# Altium PCB STM_mcu.PcbDoc
Units mm, origin at the board's own origin, x right, y up, seen from the top; angles counter-clockwise.
Board outline 31.49 x 24.36 mm, 4 copper layers (Top Layer, GND, PWR, Bottom Layer), stack 0.786 mm thick; 23 components, 31 nets, 129 pads, 54 vias.
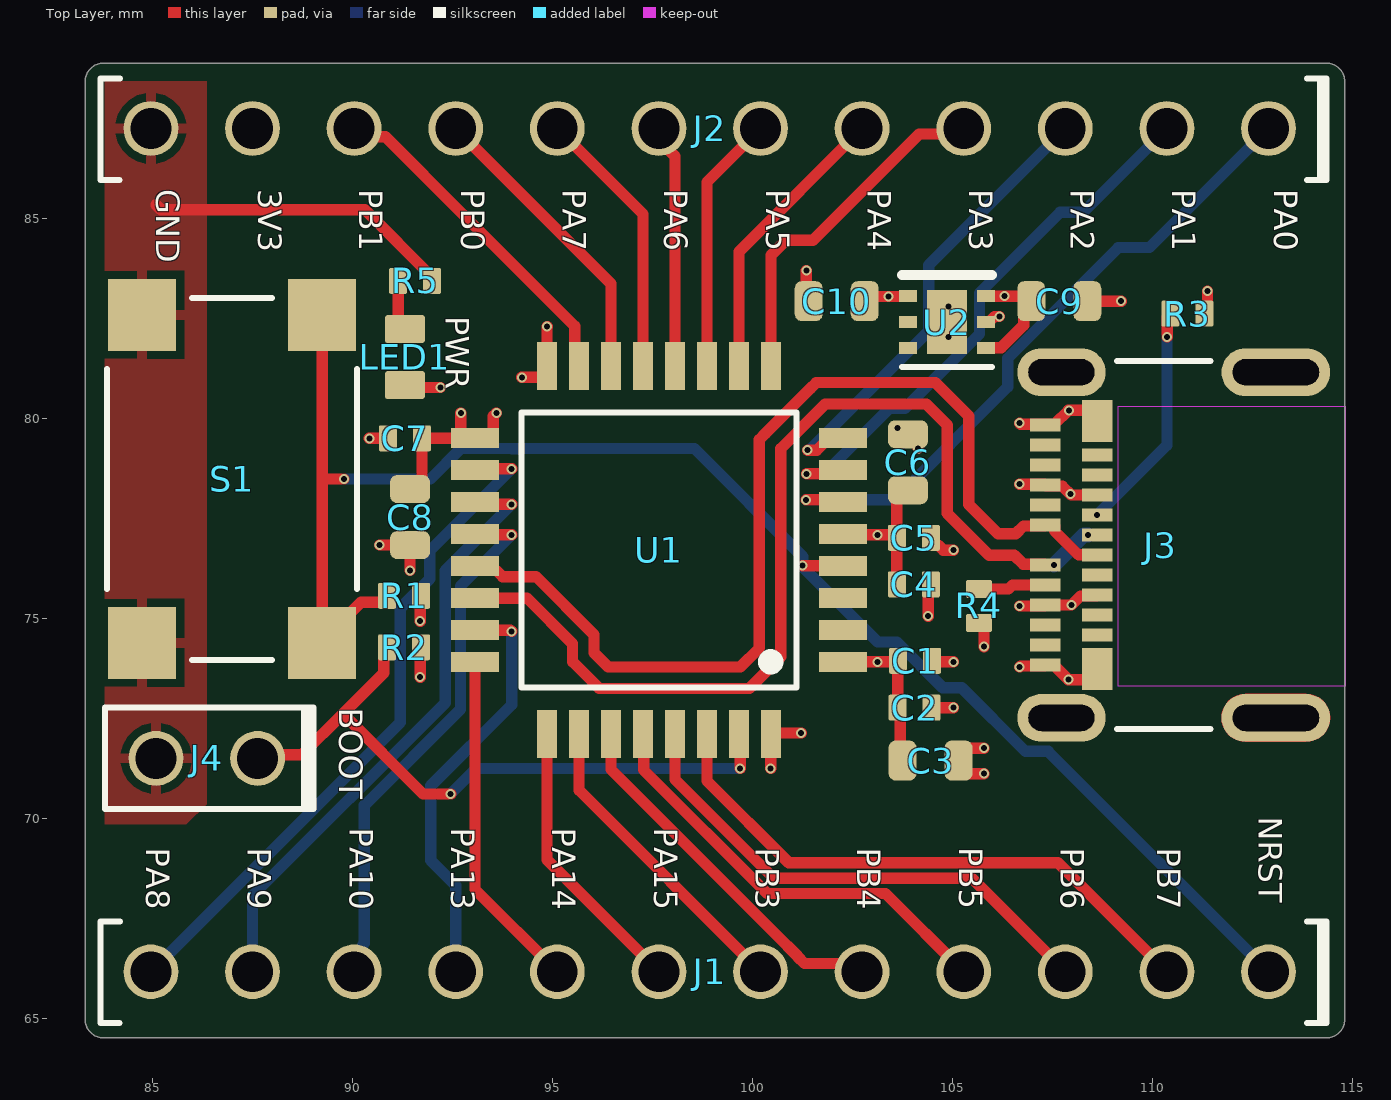
[diagram p0: Top Layer view]
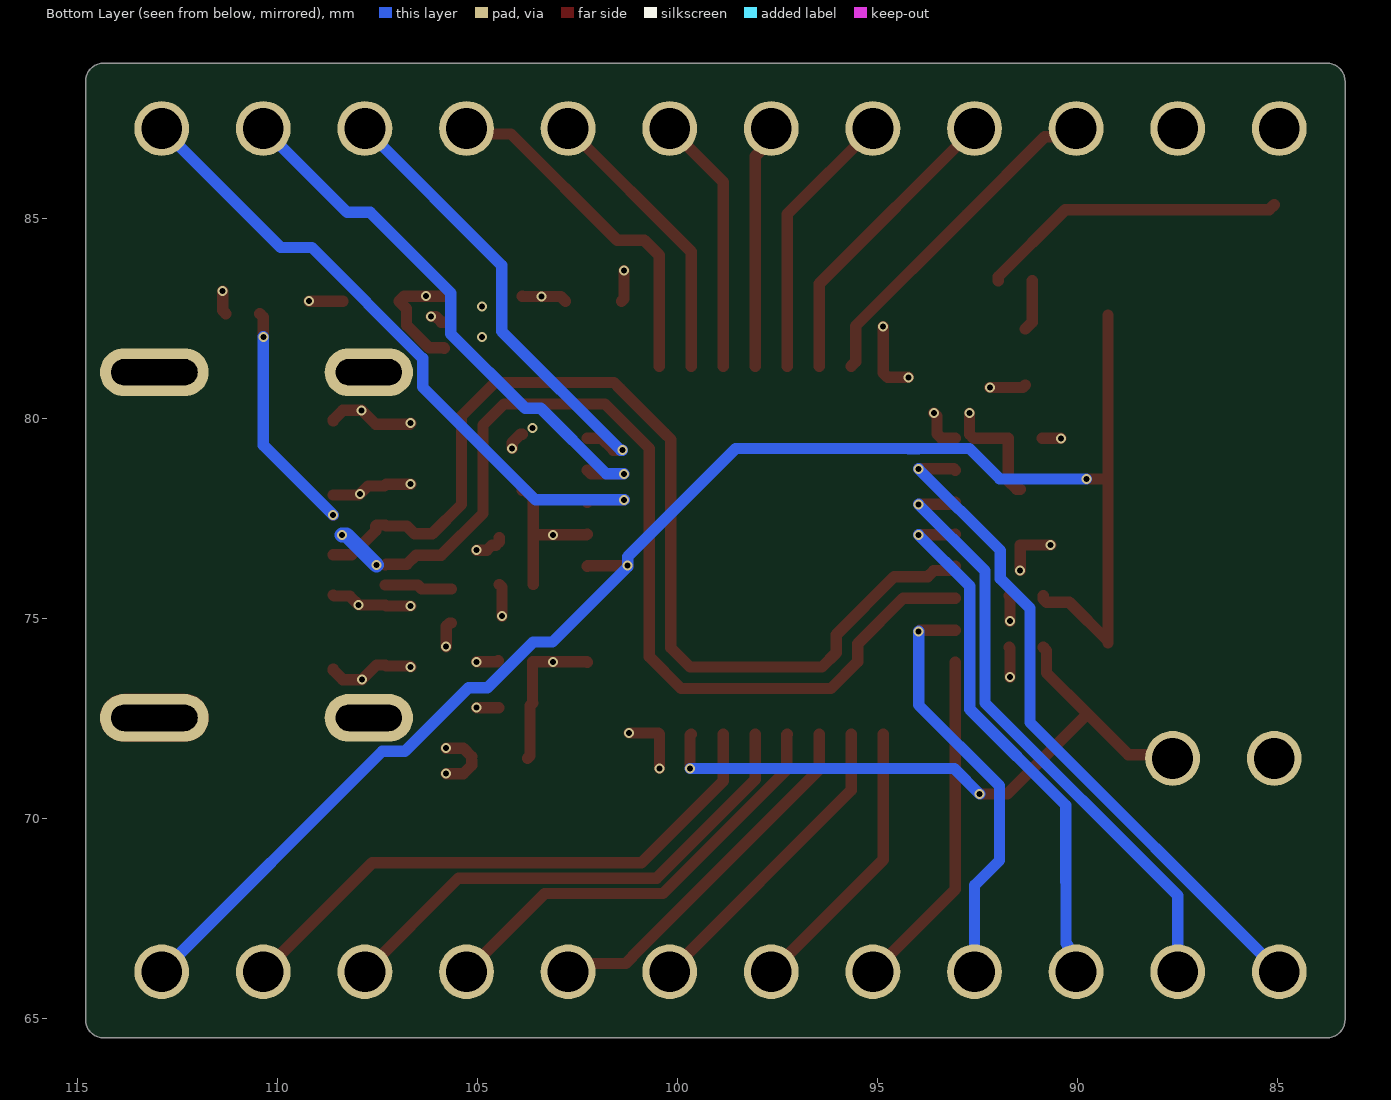
[diagram p1: Bottom Layer view, seen from below]
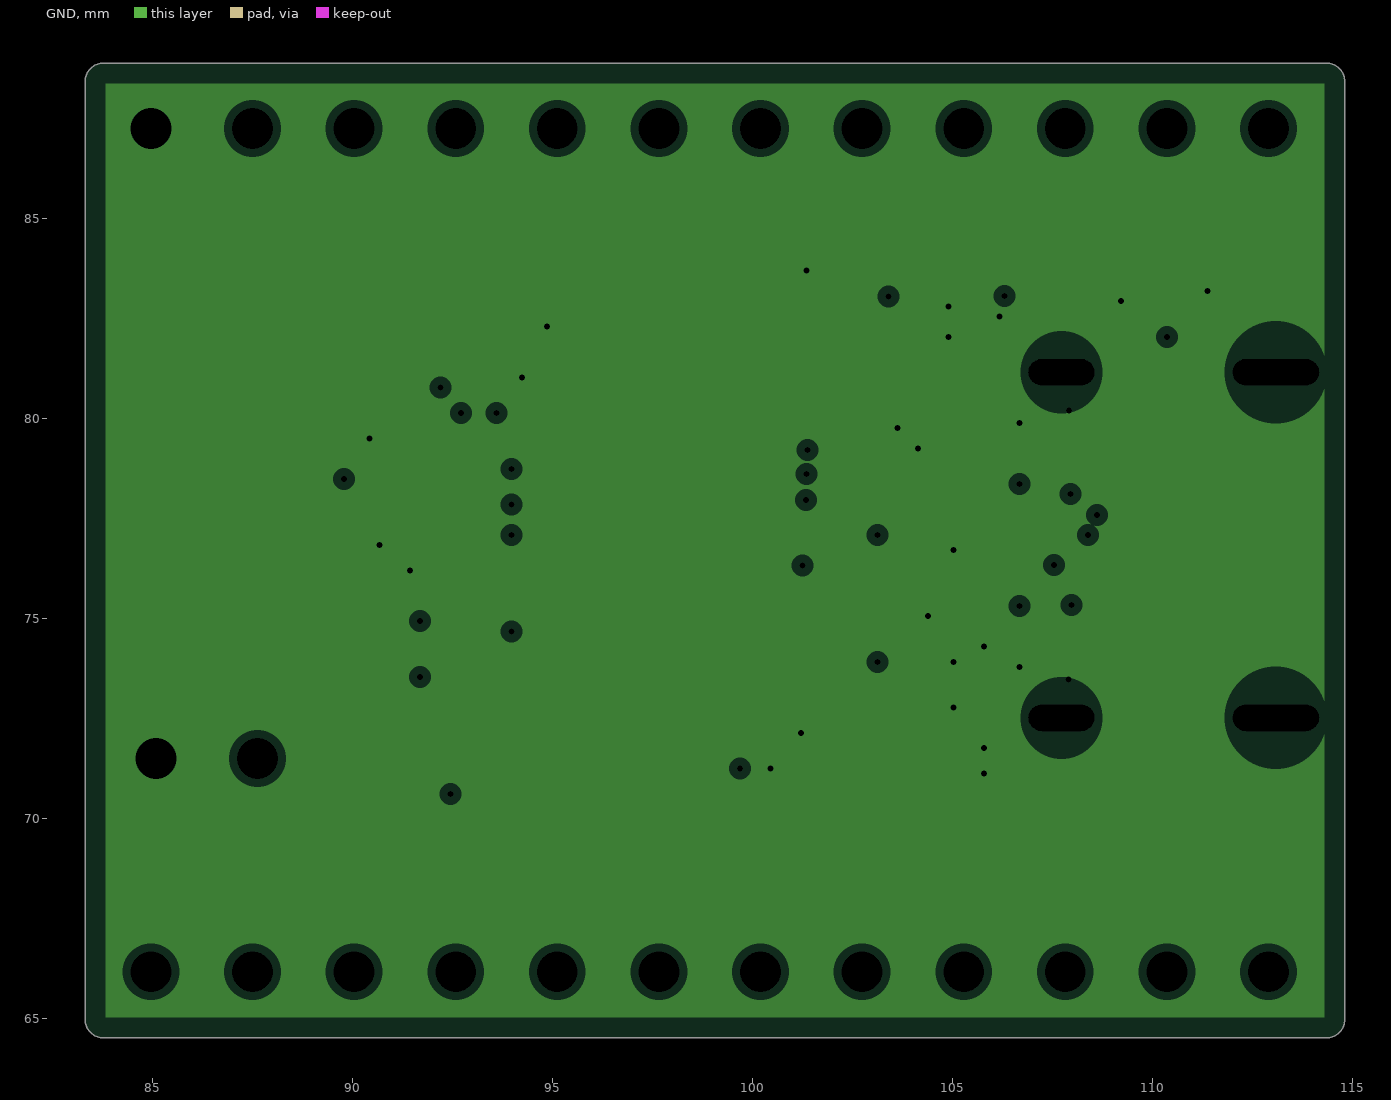
[diagram p2: GND, clearances drawn from the general rule]
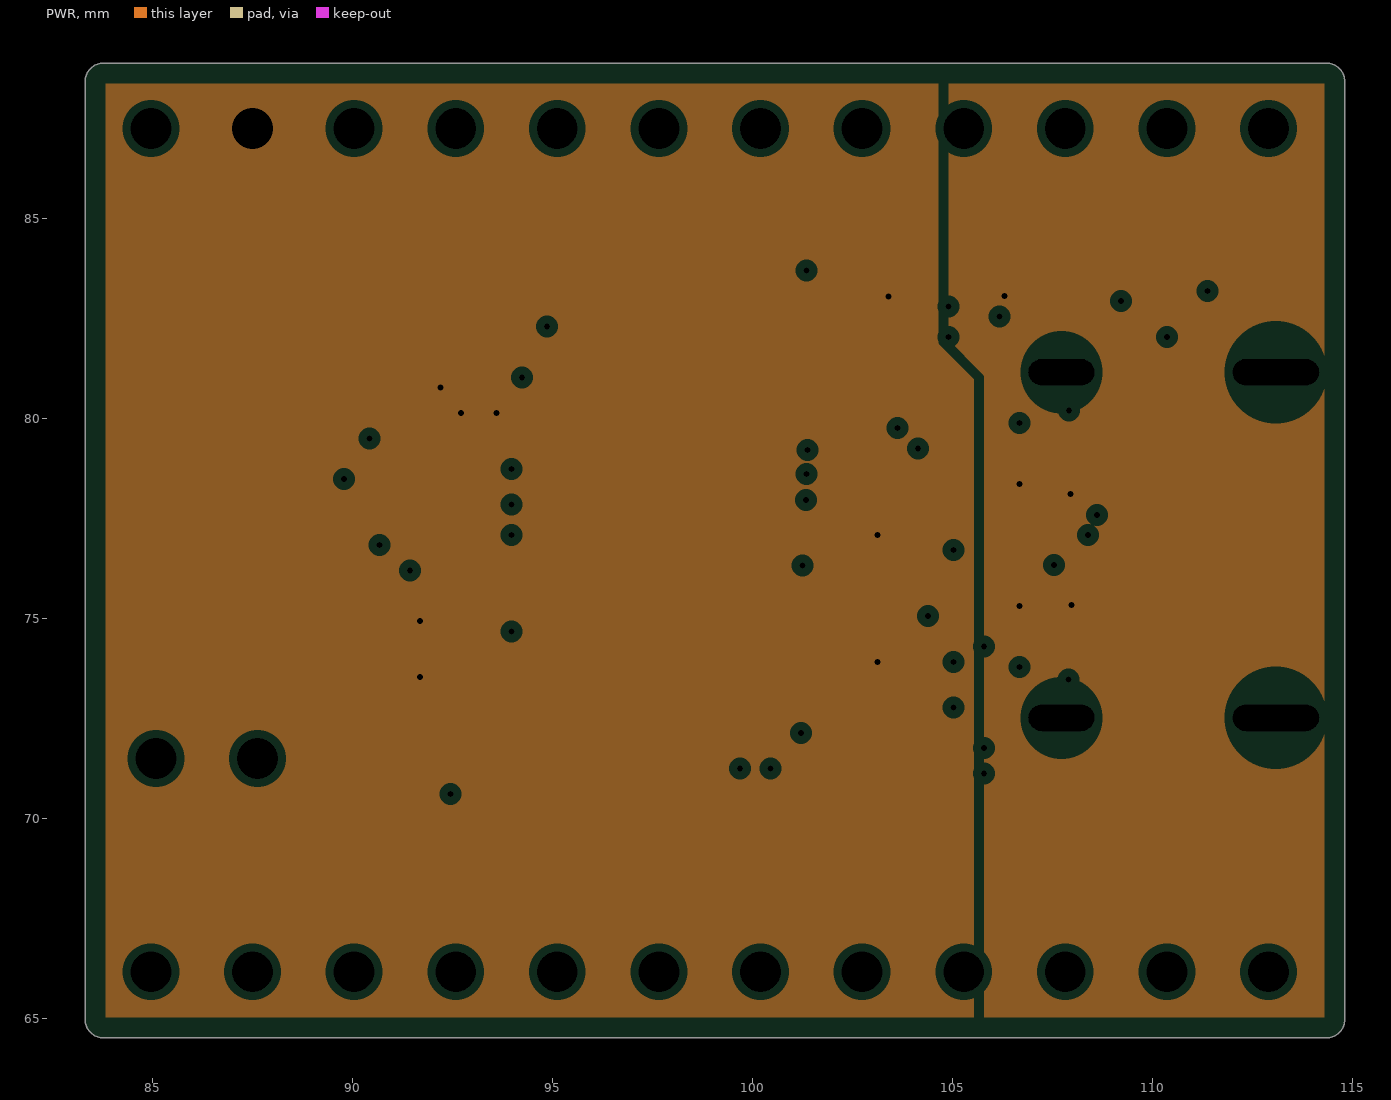
[diagram p3: PWR, clearances drawn from the general rule]

## Layer stack, top to bottom
Top Solder: solder mask 0.0152, Solder Resist, Dk 3.8
Top Layer: signal copper 0.035
Dielectric 2: prepreg 0.203, 7628, Dk 4.4
GND: plane copper 0.03, net GND
Dielectric 1: dielectric 0.25, FR-4, Dk 4.6
PWR: plane copper 0.03, net (Multiple Nets)
Dielectric 3: prepreg 0.203, 7628, Dk 4.4
Bottom Layer: signal copper 0.035
Bottom Solder: solder mask 0.0152, Solder Resist, Dk 3.8

## Board outline
83.32,64.97 83.32,88.427 cw(c83.774,88.427) 83.774,88.881 114.354,88.881 cw(c114.354,88.427) 114.808,88.427 114.808,64.97 cw(c114.354,64.97) 114.354,64.516 83.774,64.516 cw(c83.774,64.97)

## Design rules (kind name [scope] priority, off if disabled: settings)
BoardOutlineClearance [All] p1: gap=0.2 ignorepadtopadclearanceinfootprint=FALSE
Clearance [All] p1: gap=0.1 ignorepadtopadclearanceinfootprint=FALSE except(0: SMDPad-Via SMDPad-Hole; 0.15: SMDPad-SMDPad; 0.2: Arc-Via Arc-Text Track-Via Track-Text SMDPad-Text THPad-Via THPad-Text Via-Via Via-Fill Via-Poly Via-Region Via-Text Fill-Text Poly-Text Region-Text Text-Text; 0.28: Arc-Hole Track-Hole THPad-Hole Via-Hole Fill-Hole Poly-Hole Region-Hole Text-Hole; 0.3: THPad-Fill THPad-Poly THPad-Region; 0.45: THPad-THPad)
DiffPairsRouting [All] p1: maxlimit=0.254 minlimit=0.203 mostfreqgap=0.254 toplayer_minwidth=0.283 toplayer_maxwidth=0.381 toplayer_prefwidth=0.381 bottomlayer_minwidth=0.283 bottomlayer_maxwidth=0.381 bottomlayer_prefwidth=0.381 maxuncoupledlength=12.7
HoleSize [All] p1: absolutevalues=TRUE maxlimit=6.3 minlimit=0.15 maxpercent=80.000 minpercent=20.000
HoleToHoleClearance [All] p1: gap=0.2 allowstackedmicrovias=TRUE
MinimumSolderMaskSliver [All] p1: minsoldermaskwidth=0.1
PlaneClearance [All] p1: clearance=0.2
PlaneConnect [All] p1: planeconnectstyle=Relief reliefexpansion=0.2 reliefentries=4 reliefconductorwidth=0.25 reliefairgap=0.2
PolygonConnect [All] p1: connectstyle=Relief reliefconductorwidth=0.254 reliefentries=4 polygonreliefangle="90 Angle" airgapwidth=0.2
RoutingVias [All] p1: holewidth=0.3 width=0.6 viastyle="Through Hole" minholewidth=0.2 minwidth=0.45 maxholewidth=0.3 maxwidth=0.6
SilkToSilkClearance [All] p1: silktosilkclearance=0
SilkToSolderMaskClearance [IsPad] p1: minsilkscreentomaskgap=0.15 clearancetoexposedcopper=TRUE
SolderMaskExpansion [All] p1: expansion=0 istentingtop=FALSE
SupplyNets "Schematic Supply Nets_4" [InNet('3V3')] p1: voltage=0.000
SupplyNets "Schematic Supply Nets_3" [InNet('5V')] p2: voltage=0.000
SupplyNets "Schematic Supply Nets_2" [InNet('GND')] p3: voltage=0.000
ViasUnderSMD [All] p1: allowed=TRUE
Width [All] p1: maxlimit=10 minlimit=0.1 preferedwidth=0.15 minimp=50.000000 maximp=50.000000 favimp=50.000000
22 further rules are at their usual default settings.

## Classes and differential pairs
differential pair D: +D_P -D_N

## Components (designator, comment, footprint, x,y, rotation, side; value= is the part's Value field where it differs from the comment)
C1 "100nF" CAPACITOR_0402 104.065,73.94 r0 top
C2 "100nF" CAPACITOR_0402 104.055,72.771 r0 top
C3 "4,7uF" CAPACITOR_0603 104.455,71.446 r0 top
C4 "100nF" CAPACITOR_0402 104.036,75.85 r0 top
C5 "100nF" CAPACITOR_0402 104.036,77.016 r0 top
C6 "4,7uF" CAPACITOR_0603 103.886,78.904 r90 top
C7 "100nF" CAPACITOR_0402 91.313,79.502 r180 top
C8 "4,7uF" CAPACITOR_0603 91.44,77.532 r270 top
C9 "1uF" CAPACITOR_0603 107.671,82.931 r0 top
C10 "1uF" CAPACITOR_0603 102.108,82.931 r180 top
J1 "Male Pins" SAMTEC_TSW-112-07-L-S 98.933,66.167 r180 top
J2 "Male Pins" SAMTEC_TSW-112-07-L-S 98.933,87.249 r180 top
J3 "USB connector" USB_C_CONN_1054500101 111.125,76.835 r90 top
J4 "TSW-102-07-S-S" SAMTEC_TSW-102-07-L-S 86.36,71.501 r180 top
LED1 "LED Blue" LED_0603 91.313,81.534 r270 top
R1 "10kR" RESISTOR_0402 91.29,75.565 r180 top
R2 "10kR" RESISTOR_0402 91.29,74.278 r180 top
R3 "5,1kR" RESISTOR_0402 110.875,82.62 r180 top
R4 "5,1kR" RESISTOR_0402 105.664,75.311 r90 top
R5 "510R" RESISTOR_0402 91.567,83.439 r180 top
S1 "SWT0310-043016GSA" "SWT0310 - switch" 86.995,78.486 r90 top
U1 "STM32F042K6T6" Quad32-STM32F042K6T6 97.663,76.708 r90 top
U2 "LP5912-3.3DRVR" LP5912 104.861,82.408 r0 top

## Footprints (in the part's own frame and the unit in brackets; to place one, negate y for a bottom-side part, rotate by r counter-clockwise, add the part's x,y. Pads: shape width x height; smd on the part's side, far side on the other; paste and mask are expansions set on the pad)
CAPACITOR_0402 [mm]
  rrect20% 0.45x0.65 smd: 1(-0.425,0) 2(0.425,0)
  body extent -0.51,-0.25 0.51,0.25, height 0.52
CAPACITOR_0603 [mm]
  rrect50% 0.7x1 smd: 1(-0.7,0) 2(0.7,0)
  body extent -0.8,-0.4 0.8,0.4, height 0.81
LED_0603 [mm]
  rrect20% 0.7x1 smd: 1(-0.7,0) 2(0.7,0)
  body extent -0.8,-0.4 0.8,0.4, height 0.6
LP5912 [mm]
  rect 0.45x0.3 smd paste+0 mask+0: 1(-0.975,0.65) 2(-0.975,0) 3(-0.975,-0.65) 4(0.975,-0.65) 5(0.975,0) 6(0.975,0.65)
  rect 1x1.6 smd paste-0.787 mask+0: 7(0,0)
  silkscreen extent -1.13,-1.13 1.13,1.17, body extent -1,-1 1,1, height 0.8
Quad32-STM32F042K6T6 [mm]
  rect 0.5x1.2 smd: 1(-2.8,-4.6) 2(-2,-4.6) 3(-1.2,-4.6) 4(-0.4,-4.6) 5(0.4,-4.6) 6(1.2,-4.6) 7(2,-4.6) 8(2.8,-4.6) 17(2.8,4.6) 18(2,4.6) 19(1.2,4.6) 20(0.4,4.6) 21(-0.4,4.6) 22(-1.2,4.6) 23(-2,4.6) 24(-2.8,4.6)
  rect 1.2x0.5 smd: 9(4.6,-2.8) 10(4.6,-2) 11(4.6,-1.2) 12(4.6,-0.4) 13(4.6,0.4) 14(4.6,1.2) 15(4.6,2) 16(4.6,2.8) 25(-4.6,2.8) 26(-4.6,2) 27(-4.6,1.2) 28(-4.6,0.4) 29(-4.6,-0.4) 30(-4.6,-1.2) 31(-4.6,-2) 32(-4.6,-2.8)
  silkscreen extent -3.44,-3.44 3.44,3.44, body extent -4.5,-4.5 4.5,4.5, height 1.6
RESISTOR_0402 [mm]
  rrect20% 0.45x0.65 smd: 1(-0.425,0) 2(0.425,0)
  body extent -0.5,-0.25 0.5,0.25, height 0.32
SAMTEC_TSW-102-07-L-S [mm]
  round 1.37 hole 1.02: 1(-1.27,0) 2(1.27,0)
  silkscreen extent -2.67,-1.27 2.54,1.27, body extent -2.67,-1.27 2.54,1.27, height 8.38
SAMTEC_TSW-112-07-L-S [mm]
  round 1.37 hole 1.02: 01(-13.97,0) 02(-11.43,0) 03(-8.89,0) 04(-6.35,0) 05(-3.81,0) 06(-1.27,0) 07(1.27,0) 08(3.81,0) 09(6.35,0) 10(8.89,0) 11(11.43,0) 12(13.97,0)
  silkscreen extent -15.42,-1.25 15.23,1.29, body extent -15.38,-1.25 15.23,1.29, height 8.38
"SWT0310 - switch" [mm]
  rect 1.8x1.7 smd: 1(-4.1,2.25) 2(4.1,2.25) 3(-4.1,-2.25) 4(4.1,-2.25)
  silkscreen extent -4.52,-3.13 4.52,3.13, body extent -4.4,-3 4.4,3, height 4.3
USB_C_CONN_1054500101 [mil]
  rect 13x30 smd paste+0 mask+0: A1(-118.11,149.96) A2(-98.43,149.96) A3(-78.74,149.96) A4(-59.06,149.96) A5(-39.37,149.96) A6(-19.68,149.96) A7(19.68,149.96) A8(39.37,149.96) A9(59.06,149.96) A10(78.74,149.96) A11(98.43,149.96) A12(118.11,149.96) B2(88.58,98.78) B3(68.9,98.78) B4(49.21,98.78) B5(29.53,98.78) B6(9.84,98.78) B7(-9.84,98.78) B8(-29.53,98.78) B9(-49.21,98.78) B10(-68.9,98.78) B11(-88.58,98.78)
  rect 41x30 smd paste+0 mask+0: B1(122.05,98.78) B12(-122.05,98.78)
  oval 47x87 hole 26 slot 65 at 90 deg paste-99999 mask-43.5: S1(-170.08,133.81) S4(170.08,133.81)
  oval 47x107 hole 26 slot 85 at 90 deg paste-99999 mask-53.5: S2(-170.08,-77.21) S3(170.08,-77.21)
  Top Layer region: -193.13,-42.62 -193.58,-47.21 -193.58,-107.21 -193.13,-111.79 -191.79,-116.2 -189.62,-120.26 -186.7,-123.83 -183.13,-126.75 -179.07,-128.92 -174.66,-130.26 -170.08,-130.71 -165.49,-130.26 -161.09,-128.92 -157.02,-126.75 -153.46,-123.83 -150.54,-120.26 -148.37,-116.2 -147.03,-111.79 -146.58,-107.21 -146.58,-47.21 -147.03,-42.62 -148.37,-38.22 -150.54,-34.15 -153.46,-30.59 -157.02,-27.67 -161.09,-25.5 -165.49,-24.16 -170.08,-23.71 -174.66,-24.16 -179.07,-25.5 -183.13,-27.67 -186.7,-30.59 -189.62,-34.15 -191.79,-38.22
  Top Layer keep-out region: -139.22,-145.29 -139.22,78.04 136.78,78.04 136.78,-145.29
  silkscreen extent -181,-13 181,79, body extent -176,-155 176,156, height 127

## Part data
C1 C2 C4 C5 C7: library part 100nF-50V-0402, "0.1 µF ±20% 50V Ceramic Capacitor X5R 0402 (1005 Metric)", Part Number=CGA2B3X5R1H104M050BB
C3 C6 C8: library part 4,7uF-25V-0603, "4.7 µF ±10% 25V Ceramic Capacitor X5R 0603 (1608 Metric)", Part Number=C1608X5R1E475K080AC
C9 C10: library part 1uF-25V-0603, "1 µF ±10% 25V Ceramic Capacitor X7R 0603 (1608 Metric)", Part Number=CGA3E1X7R1E105K080AC
J1 J2: library part TSW-112-07-L-S, "Connector Header Through Hole 12 position 0.100\" (2.54mm)", Part Number=TSW-112-07-L-S
J3: library part USB_1054500101, "Universal Serial Bus (USB) Shielded I/O Receptacle, Type C, Right-Angle, Top Mount, Surface Mount, 0.80mm Solder Tabs, Gold (Au) Flash over 0.76Âµm Palladium Nickel Plating", Part Number=1054500101
J4: "Connector Header Through Hole 2 position 0.100\" (2.54mm)", Part Number=TSW-102-07-S-S
LED1: library part LED-Blue-0603, "Blue 470nm LED Indication - Discrete 3.2V 0603 (1608 Metric)", Part Number=150060BS75000
R1 R2: library part 10kR-1%-0402, "10 kOhms ±1% 0.063W, 1/16W Chip Resistor 0402 (1005 Metric) Thick Film", Part Number=CRCW040210K0FKEDC
R3 R4: library part 5,1kR-1%-0402, "5.1 kOhms ±1% 0.063W, 1/16W Chip Resistor 0402 (1005 Metric) Thick Film", Part Number=CRCW04025K10FKEDC
R5: library part 510R-1%-0402, "510 Ohms ±1% 0.063W, 1/16W Chip Resistor 0402 (1005 Metric) Automotive AEC-Q200 Thick Film", Part Number=CRCW0402510RFKED
S1: "6mm x 6mm Gull Wing Tactile Switch", Part Number=SWT0310-043016GSA
U1: "Mainstream Arm Cortex-M0 USB line MCU with 32 Kbytes of Flash memory, 48 MHz CPU, USB, CAN and CEC functions", Part Number=STM32F042K6T6
U2: "500-mA&nbsp;low-noise&nbsp;low-IQ&nbsp;low-dropout voltage regulator with reverse current protect 6-WSON -40 to 125", Part Number=LP5912-3.3DRVR

## Via types
v1: diameter 0.25, hole 0.15, Top Layer to Bottom Layer, 52 vias
v2: diameter 0.25/0.25 (per signal layer), hole 0.15, Top Layer to Bottom Layer, 2 vias

## Nets (pads, with @x,y where several pads share a name; then routed paths per layer and width w, separated by ;. In a path a pad name is that pad's centre, name@x,y a point inside that pad or via, vN(x,y) a via of type N, cw(c..) or ccw(c..) an arc to the next point about the centre after c; other vN are vias at no path point)
3V3: C1.1 C2.1 C3.1 C4.1 C5.1 C6.1 C7.1 C8.1 C10.1 J2.11 LED1.2 R1.1 R2.1 U1.1 U1.5 U1.17 U2.1 | length 15.2
  Top Layer w0.283: LED1.2 91.375,80.772 v1(92.202,80.772) ; C8.1 91.532,78.232 91.738,78.438 C7.1 92.605,79.502 92.71,79.607 v1(92.71,80.137) ; v1(91.694,73.533) 91.694,74.257 R2.1 ; v1(91.694,74.93) 91.694,75.544 R1.1 ; U1.17 93.413,79.508 93.521,79.616 93.521,80.059 v1(93.599,80.137) ; U1.1 102.269,73.914 103.626,73.914 103.632,73.908 C2.1@103.632,72.879 ; U1.5 102.282,77.089 103.538,77.089 C5.1 ; C10.1 102.927,83.05 103.878,83.05 U2.1 ; C4.1 C5.1 ; C2.1@103.626,72.886 C2.1@103.632,72.879 ; C3.1@103.759,71.501 103.695,71.564 103.695,72.816 C2.1@103.632,72.879 ; C6.1 103.817,78.204 103.611,77.999 C5.1
  other v1: 103.124,73.914 103.124,77.089 103.402,83.05
5V: C9.1 J3.A4 J3.A9 J3.B4 J3.B9 U2.4 U2.6 | length 7.1
  Top Layer w0.283: U2.4 105.844,81.766 106.218,81.766 106.783,82.332 106.783,82.743 C9.1 106.844,83.058 U2.6 ; v1(106.68,75.311) 107.293,75.312 J3.A4 v1(107.978,75.335) 108.205,75.562 108.593,75.562 J3.B9 ; v1(106.68,78.359) 107.293,78.358 107.339,78.312 107.743,78.312 107.97,78.085 J3.B4
  other v1: 106.299,83.058
  other v2: 107.95,78.105
D_N: J3.A7 J3.B7 U1.21 | length 26.2
  Top Layer w0.283: U1.21 93.171,76.2 93.599,76.2 93.753,76.046 94.588,76.046 96.041,74.592 96.041,74.143 96.397,73.787 99.697,73.787 100.174,74.264 100.174,79.472 100.331,79.63 101.443,80.742 101.6,80.899 104.57,80.899 105.41,80.059 105.41,77.849 106.141,77.118 106.582,77.118 106.776,77.312 107.293,77.312 J3.A7 107.532,77.335 107.555,77.312 107.555,77.19 108.156,76.589 108.612,76.589 J3.B7
D_P: J3.A6 J3.B6 U1.22 | length 25.6
  Top Layer w0.283: U1.22 94.365,75.508 95.504,74.369 95.504,73.92 96.175,73.25 99.92,73.25 100.711,74.041 100.711,79.25 101.823,80.362 104.348,80.362 104.873,79.837 104.873,77.626 105.918,76.581 106.547,76.581 106.77,76.358 107.293,76.358 J3.A6
  Bottom Layer w0.381: v1(107.535,76.337) 108.284,77.086 v1(108.395,77.086)
GND: C1.2 C2.2 C3.2 C4.2 C5.2 C6.2 C7.2 C8.2 C9.2 C10.2 J2.12 J3.A1 J3.A12 J3.B1 J3.B12 J4.2 R3.1 R4.1 R5.1 S1.1 S1.2 U1.16 U1.32 U2.5 U2.7 | length 25.6
  Top Layer w0.283: 85.09,85.344 85.217,85.217 90.314,85.217 91.992,83.539 R5.1 ; v1(90.424,79.502) C7.2 ; v1(90.678,76.835) 91.437,76.835 C8.2 v1(91.44,76.2) ; v1(94.234,81.026) 94.755,81.026 94.863,81.134 U1.16 94.863,82.29 v1(94.869,82.296) ; v1(100.457,71.247) 100.457,72.102 U1.32 100.491,72.136 v1(101.219,72.136) ; v1(101.346,83.693) 101.346,82.993 C10.2 ; C6.2 103.934,79.604 104.14,79.399 v1(104.14,79.248) ; v1(104.394,75.057) 104.394,75.783 C4.2 ; C5.2 104.461,76.916 104.544,76.833 104.644,76.833 104.769,76.708 v1(105.029,76.708) ; C2.2 v1(105.029,72.771) ; C1.2 104.517,73.914 v1(105.029,73.914) ; C3.2 105.155,71.326 105.36,71.12 v1(105.791,71.12) ; C3.2@105.155,71.549 105.36,71.755 v1(105.791,71.755) ; R4.1 105.708,74.886 105.791,74.803 v1(105.791,74.295) ; U2.5 105.911,82.408 106.053,82.55 v1(106.172,82.55) ; v1(106.68,73.787) 106.705,73.812 107.293,73.812 J3.A1 107.532,73.835 107.897,73.47 108.377,73.47 108.616,73.709 J3.B12 ; v1(106.68,79.883) 106.705,79.858 107.555,79.858 107.899,80.202 108.377,80.202 108.616,79.963 J3.B1 ; C9.2 v1(109.22,82.931) ; R3.1 111.379,82.699 v1(111.379,83.185)
  other v1: 107.901,73.47 103.632,79.756 107.913,80.202 104.902,82.804
  other v2: 104.902,82.042
NetJ1_01: J1.01 R1.2 S1.3 S1.4 U1.4 | length 40.9
  Top Layer w0.283: S1.3 89.245,78.486 ; S1.3@89.245,74.436 90.215,75.406 90.782,75.406 90.865,75.489 R1.2 ; S1.4 89.245,78.486 ; v1(89.789,78.486) 89.245,78.486 ; v1(101.256,76.319) 102.252,76.319 U1.4
  Bottom Layer w0.283: v1(89.789,78.486) 91.948,78.486 92.71,79.248 93.98,79.248 93.99,79.238 94.224,79.238 94.234,79.248 98.552,79.248 101.256,76.544 101.256,76.29 103.135,74.411 103.614,74.411 104.757,73.268 105.235,73.268 106.826,71.676 107.394,71.676 J1.01
NetJ1_02: J1.02 U1.30 | length 14.6
  Top Layer w0.283: U1.30 98.863,70.936 100.908,68.891 107.639,68.891 J1.02
NetJ1_03: J1.03 U1.29 | length 12.9
  Top Layer w0.283: U1.29 98.063,70.974 100.529,68.508 105.482,68.508 J1.03
NetJ1_04: J1.04 U1.28 | length 11
  Top Layer w0.283: U1.28 97.28,72.091 97.28,71.214 100.37,68.124 103.326,68.124 J1.04
NetJ1_05: J1.05 U1.27 | length 9.3
  Top Layer w0.283: U1.27 96.463,71.225 100.589,67.099 101.135,66.553 101.135,66.541 101.301,66.375 102.535,66.375 J1.05
NetJ1_06: J1.06 U1.26 | length 7.8
  Top Layer w0.283: U1.26 95.663,70.707 J1.06
NetJ1_07: J1.07 U1.25 | length 7.1
  Top Layer w0.283: U1.25 94.863,68.967 J1.07
NetJ1_08: J1.08 U1.24 | length 8.6
  Top Layer w0.283: U1.24 93.063,68.227 J1.08
NetJ1_09: J1.09 U1.23 | length 10.5
  Top Layer w0.283: U1.23 93.948,74.708 v1(93.98,74.676)
  Bottom Layer w0.283: J1.09 92.583,68.328 91.959,68.951 91.959,70.818 93.98,72.839 v1(93.98,74.676)
NetJ1_10: J1.10 U1.20 | length 13.5
  Top Layer w0.283: U1.20 93.082,77.089 v1(93.98,77.089)
  Bottom Layer w0.283: J1.10 90.251,66.375 90.251,66.83 90.297,66.876 90.297,68.419 90.299,68.421 90.299,70.326 92.704,72.73 92.704,75.813 v1(93.98,77.089)
NetJ1_11: J1.11 U1.19 | length 15.3
  Top Layer w0.283: U1.19 93.12,77.851 v1(93.98,77.851)
  Bottom Layer w0.283: J1.11 87.503,68.072 92.32,72.889 92.32,76.191 v1(93.98,77.851)
NetJ1_12: J1.12 U1.18 | length 17.2
  Top Layer w0.283: U1.18 93.095,78.74 v1(93.98,78.74)
  Bottom Layer w0.283: J1.12 91.197,72.401 91.197,75.255 91.937,75.994 91.937,76.697 v1(93.98,78.74)
NetJ2_01: J2.01 U1.6 | length 16.8
  Top Layer w0.283: v1(101.344,77.964) 102.207,77.964 U1.6
  Bottom Layer w0.283: v1(101.344,77.964) 103.558,77.964 106.379,80.785 106.379,81.502 109.149,84.272 109.926,84.272 J2.01
NetJ2_02: J2.02 U1.7 | length 14.1
  Top Layer w0.283: v1(101.35,78.616) 102.171,78.616 U1.7
  Bottom Layer w0.283: v1(101.35,78.616) 101.353,78.613 101.786,78.613 103.426,80.253 103.815,80.253 105.675,82.113 105.675,83.137 107.691,85.152 108.266,85.152 J2.02
NetJ2_03: J2.03 U1.8 | length 11.7
  Top Layer w0.283: v1(101.382,79.207) 101.612,79.207 101.913,79.508 U1.8
  Bottom Layer w0.283: v1(101.382,79.207) 101.432,79.207 104.405,82.18 104.405,83.831 J2.03
NetJ2_04: J2.04 U1.9 | length 8.9
  Top Layer w0.283: U1.9 100.463,84.08 100.838,84.455 101.516,84.455 104.173,87.111 105.145,87.111 J2.04
NetJ2_05: J2.05 U1.10 | length 7.2
  Top Layer w0.283: U1.10 99.663,84.169 J2.05
NetJ2_06: J2.06 U1.11 | length 6.5
  Top Layer w0.283: U1.11 98.863,85.909 J2.06
NetJ2_07: J2.07 U1.12 | length 6.1
  Top Layer w0.283: J2.07 97.663,86.955 98.063,86.555 U1.12
NetJ2_08: J2.08 U1.13 | length 6.8
  Top Layer w0.283: J2.08 97.263,85.109 U1.13
NetJ2_09: J2.09 U1.14 | length 7.5
  Top Layer w0.283: J2.09 96.463,83.369 U1.14
NetJ2_10: J2.10 U1.15 | length 8.6
  Top Layer w0.283: J2.10 90.251,87.041 90.826,87.041 92.778,85.09 95.555,82.313 95.555,81.416 U1.15
NetJ3_A5: J3.A5 R4.2 | length 1.7
  Top Layer w0.283: R4.2 106.402,75.736 106.501,75.835 J3.A5
NetJ3_B5: J3.B5 R3.2 | length 5.8
  Top Layer w0.283: J3.B5@108.613,77.582 v1(108.616,77.585) ; v1(110.363,82.042) 110.367,82.046 110.367,82.537 R3.2
  Bottom Layer w0.283: v1(108.616,77.585) 110.363,79.332 v1(110.363,82.042)
NetJ4_1: J4.1 R2.2 U1.31 | length 16.6
  Top Layer w0.283: J4.1 87.724,71.595 88.74,71.595 89.761,72.616 ; R2.2 90.782,74.195 90.782,73.637 89.761,72.616 ; v1(92.456,70.612) 91.765,70.612 89.761,72.616 ; U1.31 99.695,72.076 v1(99.695,71.247)
  Bottom Layer w0.283: v1(92.456,70.612) 93.091,71.247 v1(99.695,71.247)
NetLED1_1: LED1.1 R5.2 | length 1.3
  Top Layer w0.283: R5.2 91.142,82.405 LED1.1
pads on no net: J3.A2 J3.A3 J3.A8 J3.A10 J3.A11 J3.B2 J3.B3 J3.B8 J3.B10 J3.B11 J3.S1 J3.S2 J3.S3 J3.S4 U1.2 U1.3 U2.2 U2.3

## Polygon pours and split planes (outlines as drawn)
GND on Top Layer "GND_L01_P000" (solid, pour order 0): 83.811,88.427 86.36,88.427 86.36,70.358 85.852,69.85 83.811,69.85
GND on GND (split plane): 114.298,65.026 83.83,65.026 83.83,88.37 114.298,88.37
3V3 on PWR (split plane): 104.648,81.915 104.657,81.866 104.685,81.825 105.537,80.973 105.537,65.026 83.83,65.026 83.83,88.37 104.648,88.37
5V on PWR (split plane): 114.298,65.026 105.791,65.026 105.791,81.026 105.782,81.075 105.754,81.116 104.902,81.968 104.902,88.37 114.298,88.37

## Other copper
PWR (plane layer: these items are gaps in the copper):
  lines w0.25: 104.775,88.646 104.775,81.915 105.664,81.026 105.664,64.643

## Silkscreen, mask and mechanical layers (free items; w line width, h text height)
Top Overlay:
  text "GND" at 84.897,85.725 h1 r270
  text "3V3" at 87.441,85.725 h1 r270
  text "PB1" at 89.976,85.725 h1 r270
  text "PB0" at 92.521,85.725 h1 r270
  text "PA7" at 95.057,85.725 h1 r270
  text "PA6" at 97.601,85.725 h1 r270
  text "PA5" at 100.143,85.725 h1 r270
  text "PA4" at 102.677,85.725 h1 r270
  text "PA3" at 105.221,85.725 h1 r270
  text "PA2" at 107.756,85.725 h1 r270
  text "PA1" at 110.296,85.725 h1 r270
  text "PA0" at 112.841,85.725 h1 r270
  text "PA0" at 112.841,85.725 h1 r270
  text "PWR" at 92.136,82.55 h1 r270
  text "BOOT" at 89.469,72.771 h1 r270
  text "NRST" at 112.456,70.037 h1 r270
  text "PA10" at 89.727,69.765 h1 r270
  text "PA13" at 92.267,69.767 h1 r270
  text "PA14" at 94.802,69.764 h1 r270
  text "PA15" at 97.347,69.772 h1 r270
  text "PA8" at 84.647,69.271 h1 r270
  text "PA9" at 87.187,69.271 h1 r270
  text "PB3" at 99.887,69.27 h1 r270
  text "PB4" at 102.423,69.268 h1 r270
  text "PB5" at 104.969,69.275 h1 r270
  text "PB6" at 107.507,69.27 h1 r270
  text "PB7" at 109.916,69.27 h1 r270